# EAGLE board Through_Hole_Driver (EAGLE 7.4.0)
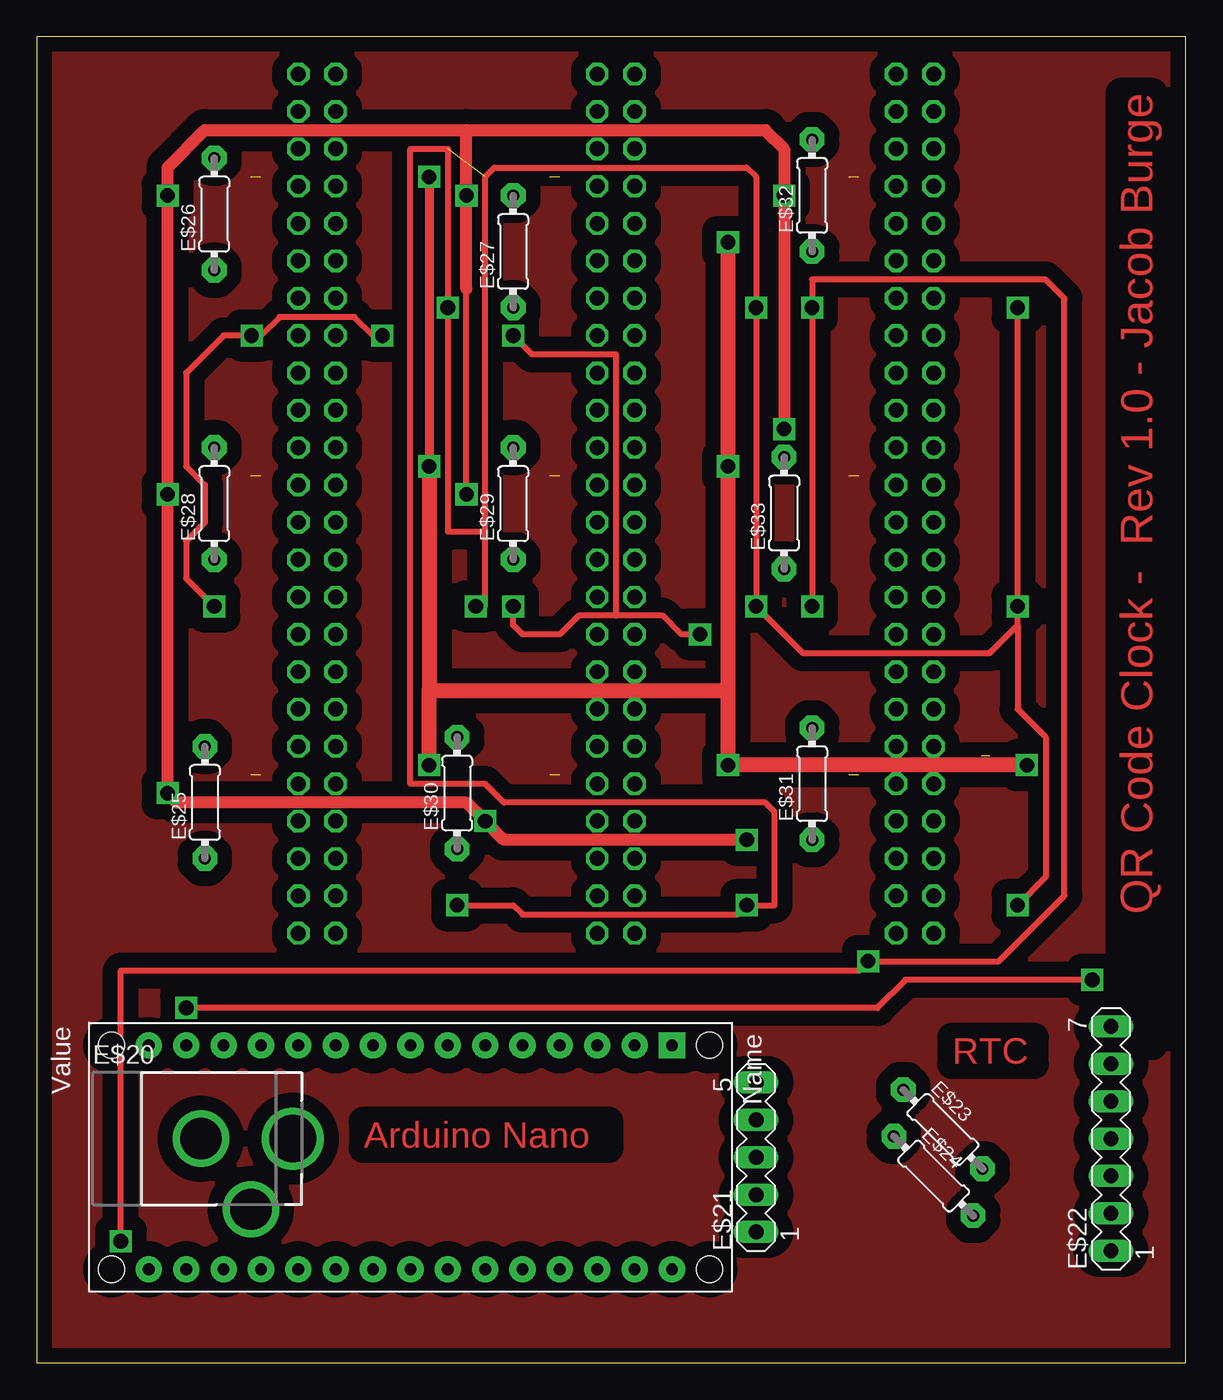
[diagram p0: board, top side]
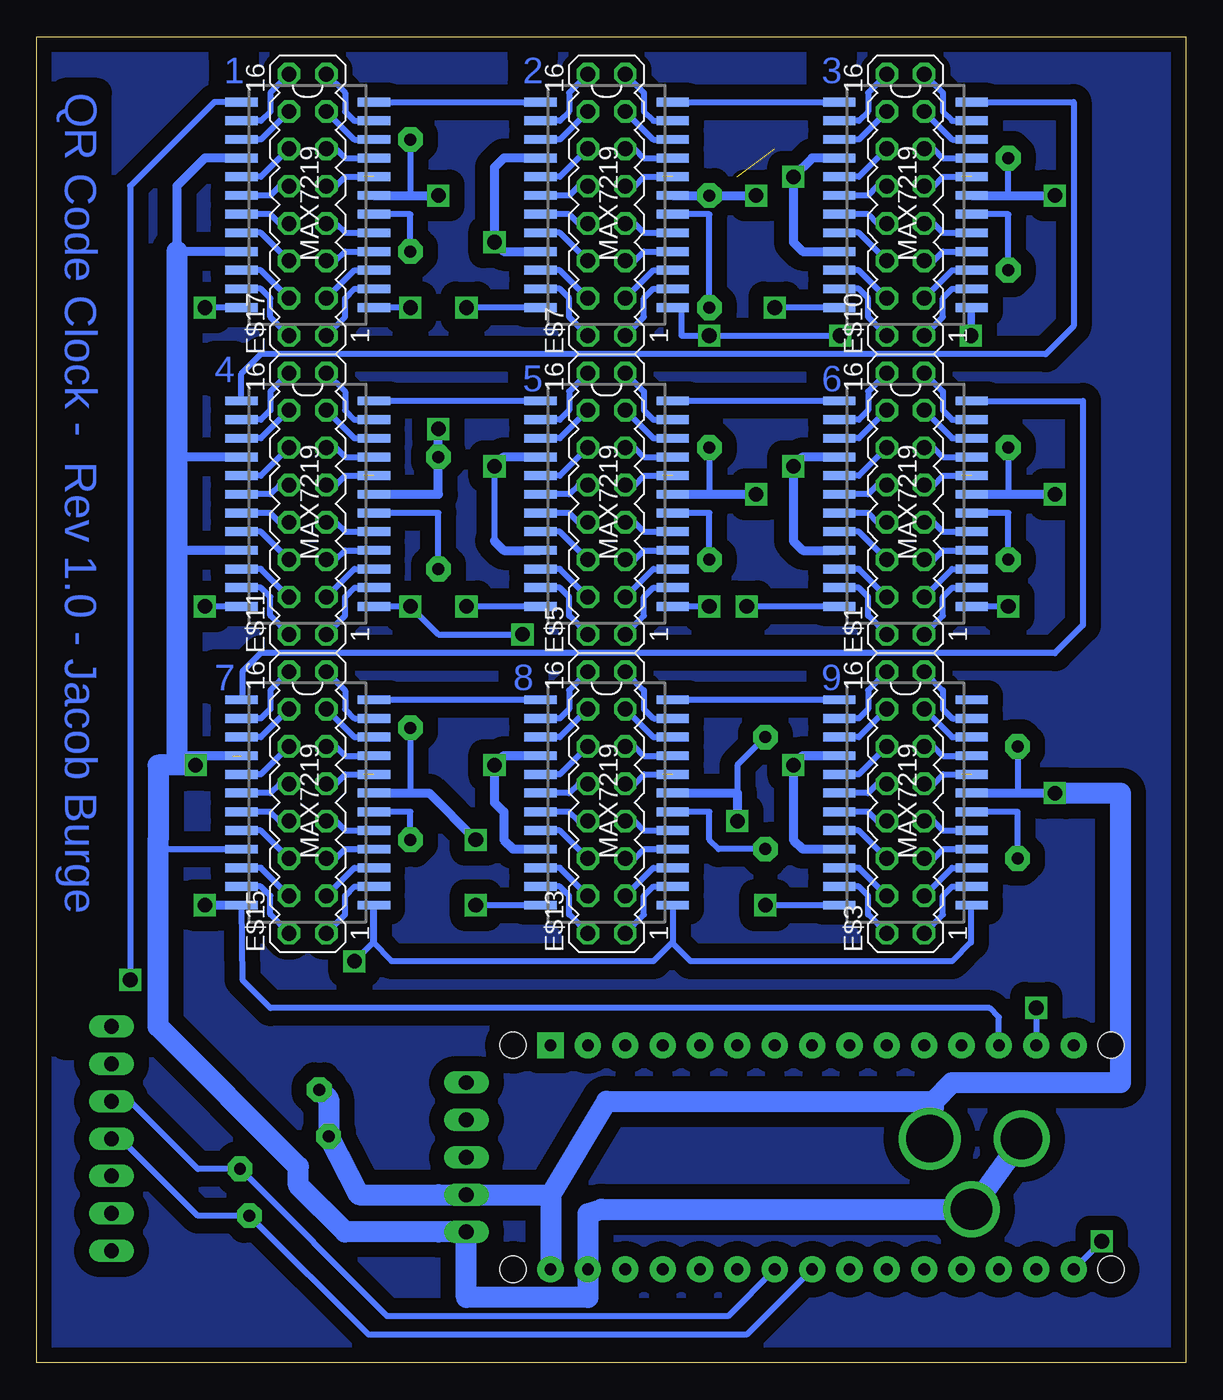
[diagram p1: board, bottom side, seen from below]

Size 78.11 x 90.17 mm. Coordinates in mm from the lower left corner, seen from the top.
Outline: 0,0 78.11,0 78.11,90.17 0,90.17 0,0
Copper layers (1*16): Top 0.035mm / dielectric 1.5mm / Bottom 0.035mm
Design rules "default": minimum track width 10mil, minimum drill 24mil, track to track 8mil, track to pad 8mil, pad to pad 8mil, via to via 8mil, smd to smd 8mil, copper to edge 40mil, drill to drill 8mil, minimum pad ring 10mil, minimum via ring 8mil, stop-mask expansion 4mil, vias tented up to drill 0mil, thermal gap 10mil

## Footprints (pad centres in the part's own frame; a part is rotated, then mirrored left to right if it is on the bottom)
MA08-2 = drill 1.016 octagon: 1 -8.89,-1.27; 2 -8.89,1.27; 3 -6.35,-1.27; 4 -6.35,1.27; 5 -3.81,-1.27; 6 -3.81,1.27; 7 -1.27,-1.27; 8 -1.27,1.27; 9 1.27,-1.27; 10 1.27,1.27; 11 3.81,-1.27; 12 3.81,1.27; 13 6.35,-1.27; 14 6.35,1.27; 15 8.89,-1.27; 16 8.89,1.27
MAX7219 = smd 2.2 x 0.6: 1 -4.5,6.985; 2 -4.5,5.715; 3 -4.5,4.445; 4 -4.5,3.175; 5 -4.5,1.905; 6 -4.5,0.635; 7 -4.5,-0.635; 8 -4.5,-1.905; 9 -4.5,-3.175; 10 -4.5,-4.445; 11 -4.5,-5.715; 12 -4.5,-6.985; 13 4.5,-6.985; 14 4.5,-5.715; 15 4.5,-4.445; 16 4.5,-3.175; 17 4.5,-1.905; 18 4.5,-0.635; 19 4.5,0.635; 20 4.5,1.905; 21 4.5,3.175; 22 4.5,4.445; 23 4.5,5.715; 24 4.5,6.985
PDIP-32 = drill 0.8 pad 1.778: 3V3 15.24,-35.56; +5V 15.24,-10.16; A0 15.24,-12.7; A1 15.24,-15.24; A2 15.24,-17.78; A3 15.24,-20.32; A4 15.24,-22.86; A5 15.24,-25.4; A6 15.24,-27.94; A7 15.24,-30.48; AREF 15.24,-33.02; D0/RX 0,-5.08; D2 0,-12.7; D3 0,-15.24; D4 0,-17.78; D5 0,-20.32; D6 0,-22.86; D7 0,-25.4; D8 0,-27.94; D9 0,-30.48; D10 0,-33.02; D11 0,-35.56; D12 0,-38.1; D13 15.24,-38.1; GND 0,-10.16; GND1 15.24,-5.08; RESET 0,-7.62; RESET1 15.24,-7.62; VIN 15.24,-2.54 | drill 0.8 pad 1.778 square: D1/TX 0,-2.54 | hole 1.778: 0,0; 0,-40.64; 15.24,-40.64; 15.24,0
DCJACK_2MM_PTH = drill 2.8: GND 0,7.35; GNDBREAK 4.8,10.75 | drill 3.2: PWR 0,13.6
MA05-1 = drill 1.016 long: 1 -5.08,0; 2 -2.54,0; 3 0,0; 4 2.54,0; 5 5.08,0
MA07-1 = drill 1.016 long: 1 -7.62,0; 2 -5.08,0; 3 -2.54,0; 4 0,0; 5 2.54,0; 6 5.08,0; 7 7.62,0
0204/7 = drill 0.813 pad 1.676 octagon: 1 -3.81,0; 2 3.81,0

## Placement (x,y rotation side)
E$1  [MA08-2]  19.05,58.42 90 bottom
E$2  [MAX7219]  19.05,58.42 0 bottom
E$3  [MA08-2]  19.05,38.1 90 bottom
E$4  [MAX7219]  19.05,38.1 0 bottom
E$5  [MA08-2]  39.37,58.42 90 bottom
E$6  [MAX7219]  39.37,58.42 0 bottom
E$7  [MA08-2]  39.37,78.74 90 bottom
E$8  [MAX7219]  39.37,78.74 0 bottom
E$9  [MAX7219]  19.05,78.74 0 bottom
E$10  [MA08-2]  19.05,78.74 90 bottom
E$11  [MA08-2]  59.69,58.42 90 bottom
E$12  [MAX7219]  59.69,58.42 0 bottom
E$13  [MA08-2]  39.37,38.1 90 bottom
E$14  [MAX7219]  39.37,38.1 0 bottom
E$15  [MA08-2]  59.69,38.1 90 bottom
E$16  [MAX7219]  59.69,38.1 0 bottom
E$17  [MA08-2]  59.69,78.74 90 bottom
E$18  [MAX7219]  59.69,78.74 0 bottom
E$19  [PDIP-32]  45.72,21.59 270 top
E$20  [DCJACK_2MM_PTH]  3.81,15.24 270 top
E$21  [MA05-1]  48.89,13.97 90 top
E$22  [MA07-1]  73.03,15.24 90 top
E$23  [0204/7]  61.59,15.88 315 top
E$24  [0204/7]  60.96,12.7 315 top
E$25  [0204/7]  11.43,38.1 90 top
E$26  [0204/7]  12.07,78.1 90 top
E$27  [0204/7]  32.38,75.56 90 top
E$28  [0204/7]  12.07,58.42 90 top
E$29  [0204/7]  32.38,58.42 90 top
E$30  [0204/7]  28.57,38.73 90 top
E$31  [0204/7]  52.7,39.37 90 top
E$32  [0204/7]  52.7,79.38 90 top
E$33  [0204/7]  50.8,57.79 90 top

## Library data of the parts
E$1 E$3 E$5 E$7 E$10 E$11 E$13 E$15 E$17 E$21 E$22 = con-lstb
E$2 E$4 E$6 E$8 E$9 E$12 E$14 E$16 E$18 E$20 E$23-E$33 = adafruit
E$19 = jet-lib (1)

## Nets
S$1: E$9.23 E$10.15
S$4: E$9.22 E$10.13
S$5: E$9.21 E$10.11
S$6: E$9.20 E$10.9
S$7: E$9.17 E$10.7
S$9: E$9.16 E$10.5
S$10: E$9.15 E$10.3
S$11: E$9.14 E$10.1
S$12: E$9.2 E$10.16
S$13: E$9.3 E$10.14
S$14: E$9.5 E$10.12
S$15: E$9.6 E$10.10
S$16: E$9.7 E$10.8
S$17: E$9.8 E$10.6
S$18: E$9.10 E$10.4
S$19: E$9.11 E$10.2
S$20: E$1.15 E$2.23
S$21: E$1.13 E$2.22
S$22: E$1.11 E$2.21
S$23: E$1.9 E$2.20
S$25: E$1.7 E$2.17
S$26: E$1.5 E$2.16
S$27: E$1.3 E$2.15
S$28: E$1.1 E$2.14
S$29: E$1.16 E$2.2
S$30: E$1.14 E$2.3
S$31: E$1.12 E$2.5
S$32: E$1.10 E$2.6
S$33: E$1.8 E$2.7
S$34: E$1.6 E$2.8
S$35: E$1.4 E$2.10
S$36: E$1.2 E$2.11
S$37: E$3.15 E$4.23
S$38: E$3.13 E$4.22
S$39: E$3.11 E$4.21
S$40: E$3.9 E$4.20
S$43: E$3.7 E$4.17
S$44: E$3.5 E$4.16
S$45: E$3.3 E$4.15
S$46: E$3.1 E$4.14
S$47: E$3.16 E$4.2
S$48: E$3.14 E$4.3
S$49: E$3.12 E$4.5
S$50: E$3.10 E$4.6
S$51: E$3.8 E$4.7
S$52: E$3.6 E$4.8
S$53: E$3.4 E$4.10
S$54: E$3.2 E$4.11
S$55: E$5.15 E$6.23
S$57: E$5.13 E$6.22
S$58: E$5.11 E$6.21
S$59: E$5.9 E$6.20
S$60: E$5.7 E$6.17
S$61: E$5.5 E$6.16
S$62: E$5.3 E$6.15
S$63: E$5.1 E$6.14
S$64: E$5.16 E$6.2
S$65: E$5.14 E$6.3
S$66: E$5.12 E$6.5
S$68: E$5.10 E$6.6
S$69: E$5.8 E$6.7
S$70: E$5.6 E$6.8
S$71: E$5.4 E$6.10
S$72: E$5.2 E$6.11
S$73: E$7.15 E$8.23
S$74: E$7.13 E$8.22
S$75: E$7.11 E$8.21
S$76: E$7.9 E$8.20
S$77: E$7.7 E$8.17
S$78: E$7.5 E$8.16
S$79: E$7.3 E$8.15
S$80: E$7.1 E$8.14
S$81: E$7.16 E$8.2
S$82: E$7.14 E$8.3
S$83: E$7.12 E$8.5
S$84: E$7.10 E$8.6
S$85: E$7.8 E$8.7
S$86: E$7.6 E$8.8
S$87: E$7.4 E$8.10
S$88: E$7.2 E$8.11
S$89: E$13.15 E$14.23
S$90: E$13.13 E$14.22
S$91: E$13.11 E$14.21
S$92: E$13.9 E$14.20
S$93: E$13.7 E$14.17
S$94: E$13.5 E$14.16
S$95: E$13.3 E$14.15
S$96: E$13.1 E$14.14
S$97: E$13.16 E$14.2
S$98: E$13.14 E$14.3
S$99: E$13.12 E$14.5
S$100: E$13.10 E$14.6
S$101: E$13.8 E$14.7
S$102: E$13.6 E$14.8
S$103: E$13.4 E$14.10
S$104: E$13.2 E$14.11
S$105: E$15.15 E$16.23
S$106: E$15.13 E$16.22
S$107: E$15.11 E$16.21
S$108: E$15.9 E$16.20
S$109: E$15.7 E$16.17
S$110: E$15.5 E$16.16
S$111: E$15.3 E$16.15
S$112: E$15.1 E$16.14
S$113: E$15.16 E$16.2
S$114: E$15.14 E$16.3
S$115: E$15.12 E$16.5
S$116: E$15.10 E$16.6
S$117: E$15.8 E$16.7
S$118: E$15.6 E$16.8
S$119: E$15.4 E$16.10
S$120: E$15.2 E$16.11
S$121: E$11.15 E$12.23
S$122: E$11.13 E$12.22
S$123: E$11.11 E$12.21
S$124: E$11.9 E$12.20
S$125: E$11.7 E$12.17
S$126: E$11.5 E$12.16
S$127: E$11.3 E$12.15
S$128: E$11.1 E$12.14
S$129: E$11.16 E$12.2
S$130: E$11.14 E$12.3
S$131: E$11.12 E$12.5
S$132: E$11.10 E$12.6
S$133: E$11.8 E$12.7
S$134: E$11.6 E$12.8
S$135: E$11.4 E$12.10
S$136: E$11.2 E$12.11
S$137: E$17.15 E$18.23
S$138: E$17.13 E$18.22
S$139: E$17.11 E$18.21
S$140: E$17.9 E$18.20
S$141: E$17.7 E$18.17
S$142: E$17.5 E$18.16
S$143: E$17.3 E$18.15
S$144: E$17.1 E$18.14
S$145: E$17.16 E$18.2
S$146: E$17.14 E$18.3
S$147: E$17.12 E$18.5
S$148: E$17.10 E$18.6
S$149: E$17.8 E$18.7
S$150: E$17.6 E$18.8
S$151: E$17.4 E$18.10
S$153: E$17.2 E$18.11
S$154: E$2.13 E$4.13 E$6.13 E$8.13 E$9.13 E$12.13 E$14.13 E$16.13 E$18.13 E$19.D13
S$155: E$18.1 E$19.D11
S$156: E$14.1
S$157: E$2.12 E$4.12 E$6.12 E$8.12 E$9.12 E$12.12 E$14.12 E$16.12 E$18.12 E$19.D10
S$158: E$8.1 E$18.24
S$159: E$8.24 E$9.1
S$160: E$9.24 E$12.1
S$161: E$6.1
S$162: E$2.1 E$6.24
S$163: E$2.24 E$16.1
S$164: E$4.1 E$14.24
S$165: E$12.24
S$166: E$2.19 E$4.19 E$6.19 E$8.19 E$9.19 E$12.19 E$14.19 E$16.19 E$18.19 E$19.VIN E$20.PWR E$23.1 E$24.1 E$25.2 E$26.2 E$28.2 E$29.2 E$30.2 E$31.2 E$32.2
S$167: E$19.A2 E$22.5 E$23.2
S$168: E$2.4 E$2.9 E$4.4 E$4.9 E$6.4 E$6.9 E$8.4 E$8.9 E$9.4 E$9.9 E$12.4 E$12.9 E$14.4 E$14.9 E$16.4 E$16.9 E$18.4 E$18.9 E$19.GND1 E$20.GND E$20.GNDBREAK
S$169: E$19.A3 E$22.4 E$24.2
S$170: E$9.18 E$26.1
S$171: E$8.18 E$27.1
S$172: E$4.18 E$25.1
S$173: E$2.18 E$28.1
S$174: E$6.18 E$29.1
S$175: E$14.18 E$30.1
S$176: E$16.18 E$31.1
S$177: E$18.18 E$32.1
S$178: E$12.18 E$33.1

## Tracks (layer width: path | path; a pad name or v marks a point on that pad's centre or on a via)
S$1
  Bottom 0.406: E$10.15 16.51,86.36 16.51,85.09 15.88,84.45 E$9.23
S$4
  Bottom 0.406: E$10.13 15.88,83.18 E$9.22
S$5
  Bottom 0.406: E$10.11 17.14,82.55 16.51,81.91 E$9.21
S$6  (1 unrouted)
  Bottom 0.406: E$10.9 17.14,80.01 16.51,80.64 15.24,80.64
S$7
  Bottom 0.406: E$10.7 17.14,77.47 16.51,76.83 E$9.17
S$9
  Bottom 0.406: E$10.5 17.14,74.93 16.51,75.56 E$9.16
S$10
  Bottom 0.406: E$10.3 15.88,74.29 E$9.15
S$11
  Bottom 0.406: E$10.1 16.51,71.12 16.51,72.39 15.88,73.02 E$9.14
S$12
  Bottom 0.406: E$10.16 21.59,86.36 21.59,85.09 22.23,84.45 E$9.2
S$13
  Bottom 0.406: E$10.14 22.23,83.18 E$9.3
S$14
  Bottom 0.406: E$10.12 22.23,80.64 E$9.5
S$15
  Bottom 0.406: E$10.10 20.96,80.01 21.59,79.38 E$9.6
S$16
  Bottom 0.406: E$10.8 20.96,77.47 21.59,78.1 E$9.7
S$17
  Bottom 0.406: E$10.6 22.23,76.83 E$9.8
S$18
  Bottom 0.406: E$10.4 22.23,74.29 E$9.10
S$19
  Bottom 0.406: E$10.2 21.59,71.12 21.59,72.39 22.23,73.02 E$9.11
S$20
  Bottom 0.406: E$1.15 16.51,66.04 16.51,64.77 15.88,64.13 E$2.23
S$21
  Bottom 0.406: E$1.13 15.88,62.87 E$2.22
S$22
  Bottom 0.406: E$1.11 17.14,62.23 16.51,61.59 E$2.21
S$23  (1 unrouted)
  Bottom 0.406: E$1.9 17.14,59.69 16.51,60.33 15.24,60.33
S$25
  Bottom 0.406: E$1.7 17.14,57.15 16.51,56.52 E$2.17
S$26
  Bottom 0.406: E$1.5 17.14,54.61 16.51,55.25 E$2.16
S$27
  Bottom 0.406: E$1.3 15.88,53.98 E$2.15
S$28
  Bottom 0.406: E$1.1 16.51,50.8 16.51,52.07 15.88,52.7 E$2.14
S$29
  Bottom 0.406: E$1.16 21.59,66.04 21.59,64.77 22.23,64.13 E$2.2
S$30
  Bottom 0.406: E$1.14 22.23,62.87 E$2.3
S$31
  Bottom 0.406: E$1.12 22.23,60.33 E$2.5
S$32
  Bottom 0.406: E$1.10 20.96,59.69 21.59,59.05 E$2.6
S$33
  Bottom 0.406: E$1.8 20.96,57.15 21.59,57.79 E$2.7
S$34
  Bottom 0.406: E$1.6 22.23,56.52 E$2.8
S$35
  Bottom 0.406: E$1.4 22.23,53.98 E$2.10
S$36
  Bottom 0.406: E$1.2 21.59,50.8 21.59,52.07 22.23,52.7 E$2.11
S$37
  Bottom 0.406: E$3.15 16.51,45.72 16.51,44.45 15.88,43.82 E$4.23
S$38
  Bottom 0.406: E$3.13 15.88,42.55 E$4.22
S$39
  Bottom 0.406: E$3.11 17.14,41.91 16.51,41.27 E$4.21
S$40  (1 unrouted)
  Bottom 0.406: E$3.9 17.14,39.37 16.51,40.01 15.24,40.01
S$43
  Bottom 0.406: E$3.7 17.14,36.83 16.51,36.2 E$4.17
S$44
  Bottom 0.406: E$3.5 17.14,34.29 16.51,34.92 E$4.16
S$45
  Bottom 0.406: E$3.3 15.88,33.66 E$4.15
S$46
  Bottom 0.406: E$3.1 16.51,30.48 16.51,31.75 15.88,32.38 E$4.14
S$47
  Bottom 0.406: E$3.16 21.59,45.72 21.59,44.45 22.23,43.82 E$4.2
S$48
  Bottom 0.406: E$3.14 22.23,42.55 E$4.3
S$49
  Bottom 0.406: E$3.12 22.23,40.01 E$4.5
S$50
  Bottom 0.406: E$3.10 20.96,39.37 21.59,38.73 E$4.6
S$51
  Bottom 0.406: E$3.8 20.96,36.83 21.59,37.46 E$4.7
S$52
  Bottom 0.406: E$3.6 22.23,36.2 E$4.8
S$53
  Bottom 0.406: E$3.4 22.23,33.66 E$4.10
S$54
  Bottom 0.406: E$3.2 21.59,30.48 21.59,31.75 22.23,32.38 E$4.11
S$55
  Bottom 0.406: E$5.15 36.83,66.04 36.83,64.77 36.2,64.13 E$6.23
S$57
  Bottom 0.406: E$5.13 36.2,62.87 E$6.22
S$58
  Bottom 0.406: E$5.11 37.47,62.23 36.83,61.59 E$6.21
S$59  (1 unrouted)
  Bottom 0.406: E$5.9 37.47,59.69 36.83,60.33 35.56,60.33
S$60
  Bottom 0.406: E$5.7 37.47,57.15 36.83,56.52 E$6.17
S$61
  Bottom 0.406: E$5.5 37.47,54.61 36.83,55.25 E$6.16
S$62
  Bottom 0.406: E$5.3 36.2,53.98 E$6.15
S$63
  Bottom 0.406: E$5.1 36.83,50.8 36.83,52.07 36.2,52.7 E$6.14
S$64
  Bottom 0.406: E$5.16 41.91,66.04 41.91,64.77 42.55,64.13 E$6.2
S$65
  Bottom 0.406: E$5.14 42.55,62.87 E$6.3
S$66
  Bottom 0.406: E$5.12 42.55,60.33 E$6.5
S$68
  Bottom 0.406: E$5.10 41.27,59.69 41.91,59.05 E$6.6
S$69
  Bottom 0.406: E$5.8 41.27,57.15 41.91,57.79 E$6.7
S$70
  Bottom 0.406: E$5.6 42.55,56.52 E$6.8
S$71
  Bottom 0.406: E$5.4 42.55,53.98 E$6.10
S$72
  Bottom 0.406: E$5.2 41.91,50.8 41.91,52.07 42.55,52.7 E$6.11
S$73
  Bottom 0.406: E$7.15 36.83,86.36 36.83,85.09 36.2,84.45 E$8.23
S$74
  Bottom 0.406: E$7.13 36.2,83.18 E$8.22
S$75
  Bottom 0.406: E$7.11 37.47,82.55 36.83,81.91 E$8.21
S$76  (1 unrouted)
  Bottom 0.406: E$7.9 37.47,80.01 36.83,80.64 35.56,80.64
S$77
  Bottom 0.406: E$7.7 37.47,77.47 36.83,76.83 E$8.17
S$78
  Bottom 0.406: E$7.5 37.47,74.93 36.83,75.56 E$8.16
S$79
  Bottom 0.406: E$7.3 36.2,74.29 E$8.15
S$80
  Bottom 0.406: E$7.1 36.83,71.12 36.83,72.39 36.2,73.02 E$8.14
S$81
  Bottom 0.406: E$7.16 41.91,86.36 41.91,85.09 42.55,84.45 E$8.2
S$82
  Bottom 0.406: E$7.14 42.55,83.18 E$8.3
S$83
  Bottom 0.406: E$7.12 42.55,80.64 E$8.5
S$84
  Bottom 0.406: E$7.10 41.27,80.01 41.91,79.38 E$8.6
S$85
  Bottom 0.406: E$7.8 41.27,77.47 41.91,78.1 E$8.7
S$86
  Bottom 0.406: E$7.6 42.55,76.83 E$8.8
S$87
  Bottom 0.406: E$7.4 42.55,74.29 E$8.10
S$88
  Bottom 0.406: E$7.2 41.91,71.12 41.91,72.39 42.55,73.02 E$8.11
S$89
  Bottom 0.406: E$13.15 36.83,45.72 36.83,44.45 36.2,43.82 E$14.23
S$90
  Bottom 0.406: E$13.13 36.2,42.55 E$14.22
S$91
  Bottom 0.406: E$13.11 37.47,41.91 36.83,41.27 E$14.21
S$92  (1 unrouted)
  Bottom 0.406: E$13.9 37.47,39.37 36.83,40.01 35.56,40.01
S$93
  Bottom 0.406: E$13.7 37.47,36.83 36.83,36.2 E$14.17
S$94
  Bottom 0.406: E$13.5 37.47,34.29 36.83,34.92 E$14.16
S$95
  Bottom 0.406: E$13.3 36.2,33.66 E$14.15
S$96
  Bottom 0.406: E$13.1 36.83,30.48 36.83,31.75 36.2,32.38 E$14.14
S$97
  Bottom 0.406: E$13.16 41.91,45.72 41.91,44.45 42.55,43.82 E$14.2
S$98
  Bottom 0.406: E$13.14 42.55,42.55 E$14.3
S$99
  Bottom 0.406: E$13.12 42.55,40.01 E$14.5
S$100
  Bottom 0.406: E$13.10 41.27,39.37 41.91,38.73 E$14.6
S$101
  Bottom 0.406: E$13.8 41.27,36.83 41.91,37.46 E$14.7
S$102
  Bottom 0.406: E$13.6 42.55,36.2 E$14.8
S$103
  Bottom 0.406: E$13.4 42.55,33.66 E$14.10
S$104
  Bottom 0.406: E$13.2 41.91,30.48 41.91,31.75 42.55,32.38 E$14.11
S$105
  Bottom 0.406: E$15.15 57.15,45.72 57.15,44.45 56.52,43.82 E$16.23
S$106
  Bottom 0.406: E$15.13 56.52,42.55 E$16.22
S$107
  Bottom 0.406: E$15.11 57.78,41.91 57.15,41.27 E$16.21
S$108  (1 unrouted)
  Bottom 0.406: E$15.9 57.78,39.37 57.15,40.01 55.88,40.01
S$109
  Bottom 0.406: E$15.7 57.78,36.83 57.15,36.2 E$16.17
S$110
  Bottom 0.406: E$15.5 57.78,34.29 57.15,34.92 E$16.16
S$111
  Bottom 0.406: E$15.3 56.52,33.66 E$16.15
S$112
  Bottom 0.406: E$15.1 57.15,30.48 57.15,31.75 56.52,32.38 E$16.14
S$113
  Bottom 0.406: E$15.16 62.23,45.72 62.23,44.45 62.87,43.82 E$16.2
S$114
  Bottom 0.406: E$15.14 62.87,42.55 E$16.3
S$115
  Bottom 0.406: E$15.12 62.87,40.01 E$16.5
S$116
  Bottom 0.406: E$15.10 61.59,39.37 62.23,38.73 E$16.6
S$117
  Bottom 0.406: E$15.8 61.59,36.83 62.23,37.46 E$16.7
S$118
  Bottom 0.406: E$15.6 62.87,36.2 E$16.8
S$119
  Bottom 0.406: E$15.4 62.87,33.66 E$16.10
S$120
  Bottom 0.406: E$15.2 62.23,30.48 62.23,31.75 62.87,32.38 E$16.11
S$121
  Bottom 0.406: E$11.15 57.15,66.04 57.15,64.77 56.52,64.13 E$12.23
S$122
  Bottom 0.406: E$11.13 56.52,62.87 E$12.22
S$123
  Bottom 0.406: E$11.11 57.78,62.23 57.15,61.59 E$12.21
S$124  (1 unrouted)
  Bottom 0.406: E$11.9 57.78,59.69 57.15,60.33 55.88,60.33
S$125
  Bottom 0.406: E$11.7 57.78,57.15 57.15,56.52 E$12.17
S$126
  Bottom 0.406: E$11.5 57.78,54.61 57.15,55.25 E$12.16
S$127
  Bottom 0.406: E$11.3 56.52,53.98 E$12.15
S$128
  Bottom 0.406: E$11.1 57.15,50.8 57.15,52.07 56.52,52.7 E$12.14
S$129
  Bottom 0.406: E$11.16 62.23,66.04 62.23,64.77 62.87,64.13 E$12.2
S$130
  Bottom 0.406: E$11.14 62.87,62.87 E$12.3
S$131
  Bottom 0.406: E$11.12 62.87,60.33 E$12.5
S$132
  Bottom 0.406: E$11.10 61.59,59.69 62.23,59.05 E$12.6
S$133
  Bottom 0.406: E$11.8 61.59,57.15 62.23,57.79 E$12.7
S$134
  Bottom 0.406: E$11.6 62.87,56.52 E$12.8
S$135
  Bottom 0.406: E$11.4 62.87,53.98 E$12.10
S$136
  Bottom 0.406: E$11.2 62.23,50.8 62.23,52.07 62.87,52.7 E$12.11
S$137
  Bottom 0.406: E$17.15 57.15,86.36 57.15,85.09 56.52,84.45 E$18.23
S$138
  Bottom 0.406: E$17.13 56.52,83.18 E$18.22
S$139
  Bottom 0.406: E$17.11 57.78,82.55 57.15,81.91 E$18.21
S$140  (1 unrouted)
  Bottom 0.406: E$17.9 57.78,80.01 57.15,80.64 55.88,80.64
S$141
  Bottom 0.406: E$17.7 57.78,77.47 57.15,76.83 E$18.17
S$142
  Bottom 0.406: E$17.5 57.78,74.93 57.15,75.56 E$18.16
S$143
  Bottom 0.406: E$17.3 56.52,74.29 E$18.15
S$144
  Bottom 0.406: E$17.1 57.15,71.12 57.15,72.39 56.52,73.02 E$18.14
S$145
  Bottom 0.406: E$17.16 62.23,86.36 62.23,85.09 62.87,84.45 E$18.2
S$146
  Bottom 0.406: E$17.14 62.87,83.18 E$18.3
S$147
  Bottom 0.406: E$17.12 62.87,80.64 E$18.5
S$148
  Bottom 0.406: E$17.10 61.59,80.01 62.23,79.38 E$18.6
S$149
  Bottom 0.406: E$17.8 61.59,77.47 62.23,78.1 E$18.7
S$150
  Bottom 0.406: E$17.6 62.87,76.83 E$18.8
S$151
  Bottom 0.406: E$17.4 62.87,74.29 E$18.10
S$153
  Bottom 0.406: E$17.2 62.23,71.12 62.23,72.39 62.87,73.02 E$18.11
S$154  (via drill 1)
  Top 0.406: v52.7,51.44 v52.7,71.75 52.7,73.66 68.58,73.66 69.85,72.39 69.85,31.75 65.41,27.3 v56.52,27.3 55.88,26.67 5.71,26.67 v5.71,8.25 | v45.09,49.53 43.81,49.53 42.55,50.8 39.37,50.8 | 39.37,50.8 36.83,50.8 35.56,49.53 33.02,49.53 32.38,50.16 v32.38,51.44 | v23.5,69.85 22.86,69.85 21.59,71.12 16.51,71.12 15.24,69.85 v14.61,69.85 12.7,69.85 10.16,67.31 10.16,60.96 11.43,59.69 11.43,57.15 10.16,55.88 10.16,53.34 v12.07,51.44 | v32.38,69.85 33.66,68.58 39.37,68.58 39.37,50.8
  Bottom 0.406: E$4.13 14.61,31.12 14.61,28.58 15.88,27.3 33.66,27.3 34.87,28.52 E$14.13 34.87,28.63 36.2,27.3 53.98,27.3 55.24,28.58 55.24,31.06 E$16.13 55.19,28.63 v56.52,27.3 | 34.87,71.7 E$8.13 34.29,71.75 34.29,69.85 v32.38,69.85 v23.5,69.85 | v52.7,71.75 E$18.13 | E$12.13 v52.7,51.44 50.8,49.53 v45.09,49.53 | v32.38,51.44 E$6.13 | v12.07,51.44 E$2.13 | E$19.D13 v5.71,8.25 | v14.61,69.85 14.61,71.7 E$9.13 14.55,69.91 v14.61,69.85
S$155  (via drill 1)
  Top 0.406: v71.75,26.03 59.05,26.03 57.15,24.13 v10.16,24.13
  Bottom 0.406: E$18.1 66.04,85.72 71.75,80.01 v71.75,26.03 | v10.16,24.13 E$19.D11
S$156
  Bottom 0.406: E$14.1 55.24,45.09
S$157  (via drill 1)  (1 unrouted)
  Top 0.406: 30.48,56.52 27.94,56.52 v27.94,71.75 27.94,82.55 25.4,82.55 25.4,39.37 30.48,39.37 31.75,38.1 49.53,38.1 50.16,37.46 50.16,31.12 v48.26,31.12 47.62,30.48 33.02,30.48 32.38,31.12 v28.57,31.12 | v29.84,51.44 30.48,51.44 30.48,80.64 31.11,81.28 48.26,81.28 48.89,80.64 v48.89,71.75 v48.89,51.44 52.07,48.26 64.77,48.26 66.67,50.16 | 66.67,50.16 v66.67,51.44 v66.67,71.75 | 66.67,50.16 66.67,44.45 68.58,42.55 68.58,33.02 v66.67,31.12
  Bottom 0.406: 44.45,31.12 E$14.12 v48.26,31.12 | E$2.12 v29.84,51.44 | E$6.12 v48.89,51.44 | E$8.12 v48.89,71.75 | E$9.12 v27.94,71.75 | E$18.12 v66.67,71.75 | E$12.12 v66.67,51.44 | E$4.12 v28.57,31.12 | E$19.D10 12.7,23.49 13.34,24.13 62.23,24.13 64.14,26.03 E$16.12
  Bottom 0.61: E$16.12 v66.67,31.12
S$158
  Bottom 0.406: E$18.24 E$8.1
S$159
  Bottom 0.406: E$8.24 E$9.1
S$160
  Bottom 0.406: E$9.24 7.62,85.72 7.62,70.48 9.53,68.58 62.87,68.58 64.19,67.25 E$12.1
S$161
  Bottom 0.406: E$6.1 54.61,65.41
S$162
  Bottom 0.406: E$2.1 E$6.24
S$163
  Bottom 0.406: E$2.24 6.99,65.41 6.99,50.16 8.89,48.26 62.87,48.26 64.14,46.99 64.14,45.14 E$16.1
S$164
  Bottom 0.406: E$4.1 E$14.24
S$165
  Bottom 0.406: 55.24,65.46 E$12.24
S$166  (via drill 1)
  Top 0.406: v29.21,59.05 29.21,73.02
  Top 0.813: v48.26,35.56 31.75,35.56 v30.48,36.83 29.21,38.1 9.53,38.1 v8.89,38.73 v8.89,59.05 v8.89,79.38 8.89,81.28 11.43,83.82 29.21,83.82 | 29.21,73.02 v29.21,79.38 29.21,83.82 | 29.21,83.82 49.53,83.82 50.8,82.55 v50.8,79.38 v50.8,63.5
  Bottom 0.406: E$14.19 34.93,38.73 | 12.07,79.38 E$26.2 | E$25.2 11.43,38.73 | E$28.2 12.07,59.05 | E$29.2 32.38,59.05 | E$30.2 30.48,40.64 30.48,38.73 | E$31.2 52.7,38.73 | E$32.2 52.7,79.38
  Bottom 0.61: E$16.19 52.7,38.73 51.44,38.73 v48.26,35.56 | E$12.19 50.8,59.05 v50.8,63.5 | E$18.19 52.7,79.38 v50.8,79.38 | E$8.19 v29.21,79.38 | E$2.19 12.07,59.05 v8.89,59.05 | E$6.19 32.38,59.05 v29.21,59.05 | E$14.19 30.48,38.73 v30.48,36.83 | v8.89,79.38 12.07,79.38 E$9.19 | E$4.19 11.43,38.73 v8.89,38.73
  Bottom 1.422: v8.89,38.73 4.45,38.73 4.45,19.05 15.88,19.05 17.14,17.78 | 43.18,11.43 39.37,17.78 17.14,17.78 | 17.14,17.78 E$20.PWR | 43.18,11.43 50.8,11.43 56.21,11.43 E$24.1 58.27,17.93 E$23.1 | 43.18,11.43 E$19.VIN
S$167
  Bottom 0.406: E$19.A2 31.11,3.17 54.28,3.17 E$23.2 67.16,13.18 71.75,17.78 E$22.5
S$168  (via drill 1)  (1 unrouted)
  Top 0.61: v26.67,80.64 v26.67,60.96
  Top 1.016: v26.67,60.96 26.67,45.72 | v67.31,40.64 v46.99,40.64 46.99,45.72 | 46.99,45.72 v46.99,60.96 v46.99,76.2 | v26.67,40.64 26.67,45.72 | 26.67,45.72 46.99,45.72
  Bottom 0.406: 68.58,41.27 v67.31,40.64 | 69.85,35.56 69.22,34.92 E$16.9 | v46.99,60.96 46.99,55.88 | 11.16,15.11 E$20.GND
  Bottom 0.61: E$18.4 66.67,81.91 68.58,80.01 68.58,75.56 E$18.9 | E$12.4 68.58,61.59 | E$12.9 68.58,55.25 | 64.77,41.27 68.58,41.27 | E$8.4 46.35,81.91 46.99,81.28 v46.99,76.2 46.35,75.56 E$8.9 | E$6.4 46.35,61.59 v46.99,60.96 | 46.99,55.88 46.35,55.25 E$6.9 | E$9.4 25.4,81.91 v26.67,80.64 26.67,76.2 26.04,75.56 E$9.9 | E$2.4 26.04,61.59 v26.67,60.96 26.67,55.88 26.04,55.25 E$2.9 | E$4.4 26.04,41.27 v26.67,40.64 26.67,35.56 26.04,34.92 E$4.9 | E$14.4 46.35,41.27 v46.99,40.64 46.99,38.1 46.35,37.46 46.35,35.56 45.72,34.92 E$14.9
  Bottom 1.422: 68.58,75.56 68.58,61.59 68.58,55.25 68.58,41.27 | v67.31,40.64 69.85,40.64 69.85,35.56 69.85,22.86 60.33,13.34 60.33,12.06 57.15,8.89 50.8,8.89 48.89,8.89 48.89,4.44 40.64,4.44 E$19.GND1 40.64,10.16 39.73,10.44 E$20.GNDBREAK 11.16,15.11
S$169
  Bottom 0.406: E$19.A3 29.84,1.9 55.55,1.9 E$24.2 67.16,10.01 72.39,15.24 E$22.4
S$170
  Bottom 0.406: E$26.1 12.07,78.1 E$9.18
S$171
  Bottom 0.406: E$27.1 32.38,78.1 E$8.18
S$172
  Bottom 0.406: E$25.1 11.43,37.46 E$4.18
S$173
  Bottom 0.406: E$28.1 12.07,57.79 E$2.18
S$174
  Bottom 0.406: E$29.1 32.38,57.79 E$6.18
S$175
  Bottom 0.406: E$30.1 31.75,34.92 32.38,35.56 32.38,37.46 E$14.18
S$176
  Bottom 0.406: E$31.1 52.7,37.46 E$16.18
S$177
  Bottom 0.406: E$32.1 52.7,78.1 E$18.18
S$178
  Bottom 0.406: E$33.1 50.8,57.79 E$12.18
S$179
  pour Bottom (isolate 1.016): 0,90.17 0,0 78.11,0 78.11,90.17
S$180
  pour Top (isolate 1.016): 0,90.17 78.11,90.17 78.11,0 0,0

## Text on the board
Top: QR Code Clock - Rev 1.0 - Jacob Burge | RTC | Arduino Nano
Bottom: 3 | 2 | 1 | QR Code Clock - Rev 1.0 - Jacob Burge | 6 | 5 | 4 | 9 | 8 | 7